# EAGLE board hbridge_v4 (EAGLE 6.3)

Size 50 x 50 mm. Coordinates in mm from the lower left corner, seen from the top.
Outline: 0,0 0,50 50,50 50,0 0,0
Copper layers (1*16): Top 0.035mm / dielectric 1.5mm / Bottom 0.035mm
Design rules "default": minimum track width 10mil, minimum drill 24mil, track to track 8mil, track to pad 8mil, pad to pad 8mil, via to via 8mil, smd to smd 8mil, copper to edge 40mil, drill to drill 8mil, minimum pad ring 10mil, minimum via ring 8mil, stop-mask expansion 4mil, vias tented up to drill 0mil, thermal gap 10mil
Holes 3.2 mm at 3,47 47,47 47,3 3,3

## Footprints (pad centres in the part's own frame; a part is rotated, then mirrored left to right if it is on the bottom)
D-PAK_TO252AA = smd 1 x 1.6: 1 -2.28,-4.8; 3 2.28,-4.8 | smd 5.4 x 6.2: 4 0,2.5
E5-10,5 = drill 1.016 pad 2.54: + -2.54,0 | drill 1.016 pad 2.54 octagon: - 2.54,0
SMB = smd 2.4 x 2.4: A 2.2,0; C -2.2,0
CHIP-LED0805 = smd 1.2 x 1.2: A 0,-1.05; C 0,1.05
W237-102 = drill 1.194 long: 1 -2.5,-1.27; 2 2.5,-1.27
R0805 = smd 1.3 x 1.5: 1 -0.85,0; 2 0.85,0
MA05-1 = drill 1.016 long: 1 -5.08,0; 2 -2.54,0; 3 0,0; 4 2.54,0; 5 5.08,0
SOT23-BEC = smd 1 x 1.4: B -0.95,-1.1; C 0,1.1; E 0.95,-1.1

## Placement (x,y rotation side)
1  IRFR3910DPAK  [D-PAK_TO252AA]  19.05,16.51 270 top
2  IRFR3910  [D-PAK_TO252AA]  31.75,16.51 90 top
C1  [E5-10,5]  12.7,41.91 270 top
D1  MBRS130LT3  [SMB]  15.24,10.16 180 top
D2  MBRS130LT3  [SMB]  20.32,31.75 0 top
D3  MBRS130LT3  [SMB]  30.48,31.75 180 top
D4  MBRS130LT3  [SMB]  35.56,10.16 0 top
LED1  [CHIP-LED0805]  -24.13,49.53 0 top  (outside the outline)
LED2  [CHIP-LED0805]  -29.21,49.53 0 top  (outside the outline)
OUT  [W237-102]  24.9,5.35 0 top
PWRIN  [W237-102]  24.44,44.45 180 top
PWRLED  [CHIP-LED0805]  -48.26,21.59 0 top  (outside the outline)
Q1  IRFR9024NDPAK  [D-PAK_TO252AA]  18.92,25.26 270 top
Q2  IRFR9024  [D-PAK_TO252AA]  31.75,25.4 90 top
R1  [R0805]  -21.59,54.61 0 top  (outside the outline)
R2  [R0805]  -26.67,54.61 0 top  (outside the outline)
R3  [R0805]  11.43,25.4 270 top
R4  [R0805]  39.37,27.94 270 top
R5  [R0805]  -41.91,54.61 0 top  (outside the outline)
R6  [R0805]  -46.99,54.61 0 top  (outside the outline)
R7  [R0805]  15.24,31.75 90 top
R8  [R0805]  40.64,33.02 270 top
R9  [R0805]  -15.24,58.42 0 top  (outside the outline)
R10  [R0805]  -35.56,48.26 0 top  (outside the outline)
R11  [R0805]  -16.51,54.61 0 top  (outside the outline)
R12  [R0805]  -40.64,48.26 0 top  (outside the outline)
R13  [R0805]  -45.72,48.26 0 top  (outside the outline)
R14  [R0805]  -50.8,48.26 0 top  (outside the outline)
R15  [R0805]  -55.88,48.26 0 top  (outside the outline)
SIG  [MA05-1]  -33.02,41.91 0 top  (outside the outline)
T1  [SOT23-BEC]  11.43,30.48 180 top
T2  [SOT23-BEC]  36.83,31.75 180 top
T3  [SOT23-BEC]  -52.07,40.64 0 top  (outside the outline)
T4  [SOT23-BEC]  -57.15,40.64 0 top  (outside the outline)
T5  [SOT23-BEC]  68.58,30.48 0 top  (outside the outline)
T6  [SOT23-BEC]  86.36,20.32 0 top  (outside the outline)

## Library data of the parts
1 2 Q1 Q2 = RobThePyro
C1 R1-R15 = resistor
D1-D4 = diode
LED1 LED2 PWRLED = led
OUT PWRIN = con-wago-500; MPN: 237-102; OC_FARNELL: unknown; OC_NEWARK: 70K9898
SIG = con-lstb; OC_FARNELL: unknown; OC_NEWARK: unknown
T1-T6 = transistor

## Nets
AH: R7.2 SIG.5
AL: R12.2 SIG.4
BH: R8.1 SIG.2
BL: R14.1 SIG.1
GND: 1.3 2.3 C1.- D1.A D4.A PWRIN.2 PWRLED.C SIG.3 T1.E T2.E T3.E T4.E T5.E T6.E
M1: 1.4 D1.C D2.A LED2.C OUT.1 Q1.4 R1.1
M2: 2.4 D3.A D4.C LED1.C OUT.2 Q2.4 R2.2
N$1: LED2.A R2.1
N$2: LED1.A R1.2
N$3: 1.1 R9.1
N$4: R6.1 R9.2 T3.C
N$5: R11.2 T3.B T4.C
N$6: Q1.1 R3.1 T1.C
N$7: Q2.1 R4.1 T2.C
N$8: 2.1 R10.2
N$9: R7.1 T1.B
N$10: R12.1 T4.B
N$11: R8.2 T2.B
N$12: R5.2 R10.1 T6.C
N$14: R13.2 T5.C T6.B
N$17: R14.2 T5.B
N$26: PWRLED.A R15.2
VCC: C1.+ D2.C D3.C PWRIN.1 Q1.3 Q2.3 R3.2 R4.2 R5.1 R6.2 R11.1 R13.1 R15.1

## Tracks (layer width: path | path; a pad name or v marks a point on that pad's centre or on a via)
AH  (1 unrouted)
AL  (1 unrouted)
BH  (1 unrouted)
BL  (1 unrouted)
GND  (13 unrouted)
M1  (6 unrouted)
M2  (6 unrouted)
N$1  (1 unrouted)
N$2  (1 unrouted)
N$3  (1 unrouted)
N$4  (2 unrouted)
N$5  (2 unrouted)
N$6  (2 unrouted)
N$7  (2 unrouted)
N$8  (1 unrouted)
N$9  (1 unrouted)
N$10  (1 unrouted)
N$11  (1 unrouted)
N$12  (2 unrouted)
N$14  (2 unrouted)
N$17  (1 unrouted)
N$26  (1 unrouted)
VCC  (12 unrouted)